# EAGLE board Dashboard Test External rev0 (EAGLE 7.6.0)
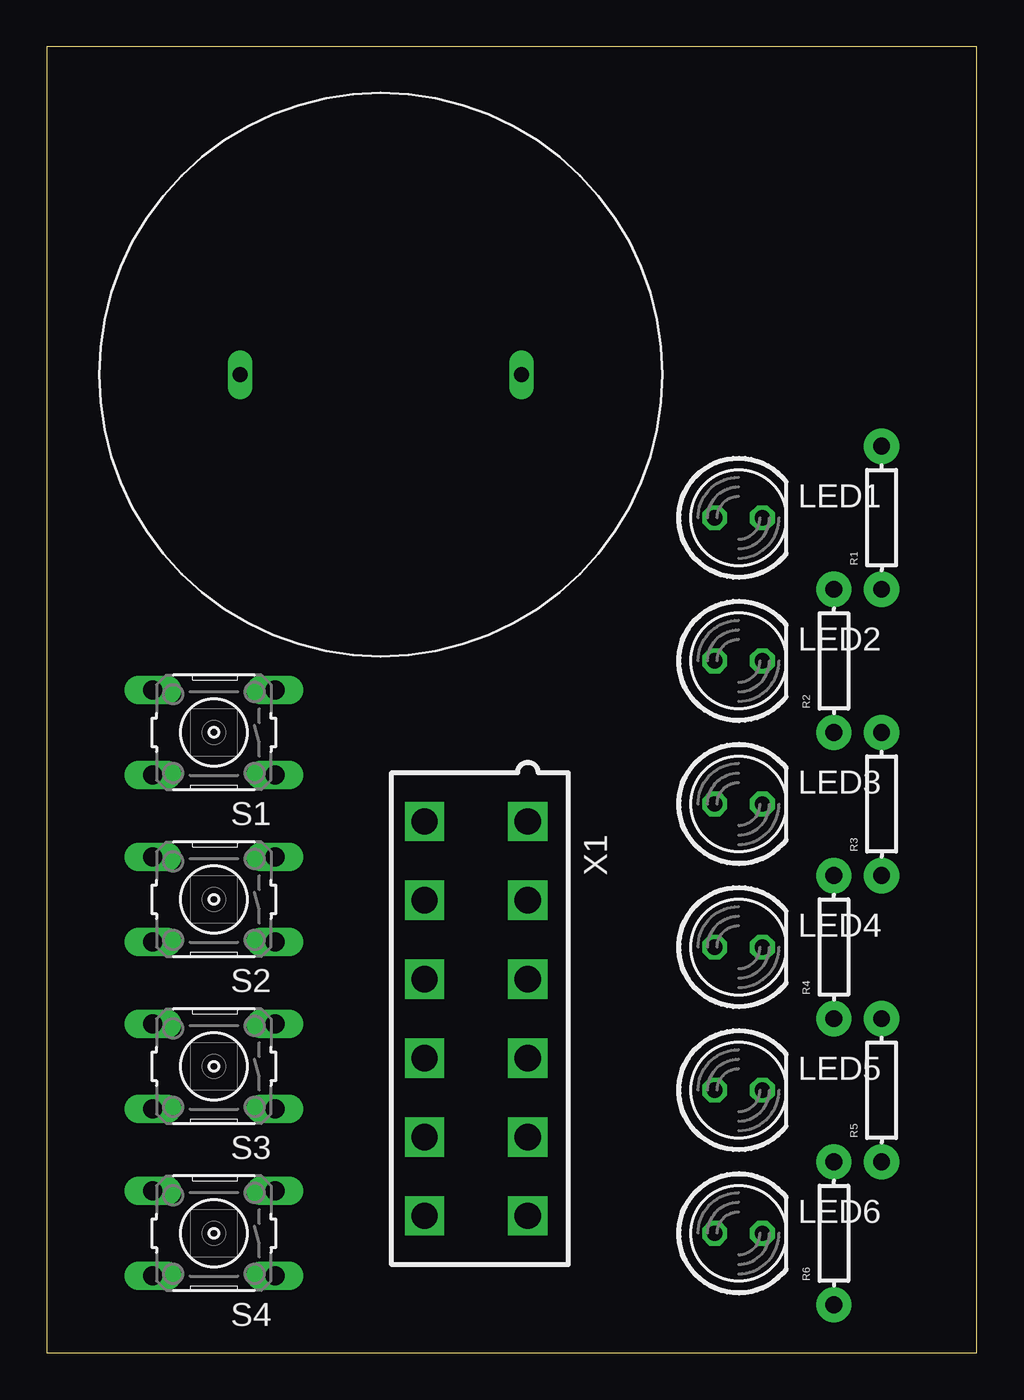
[diagram p0: board, top side]
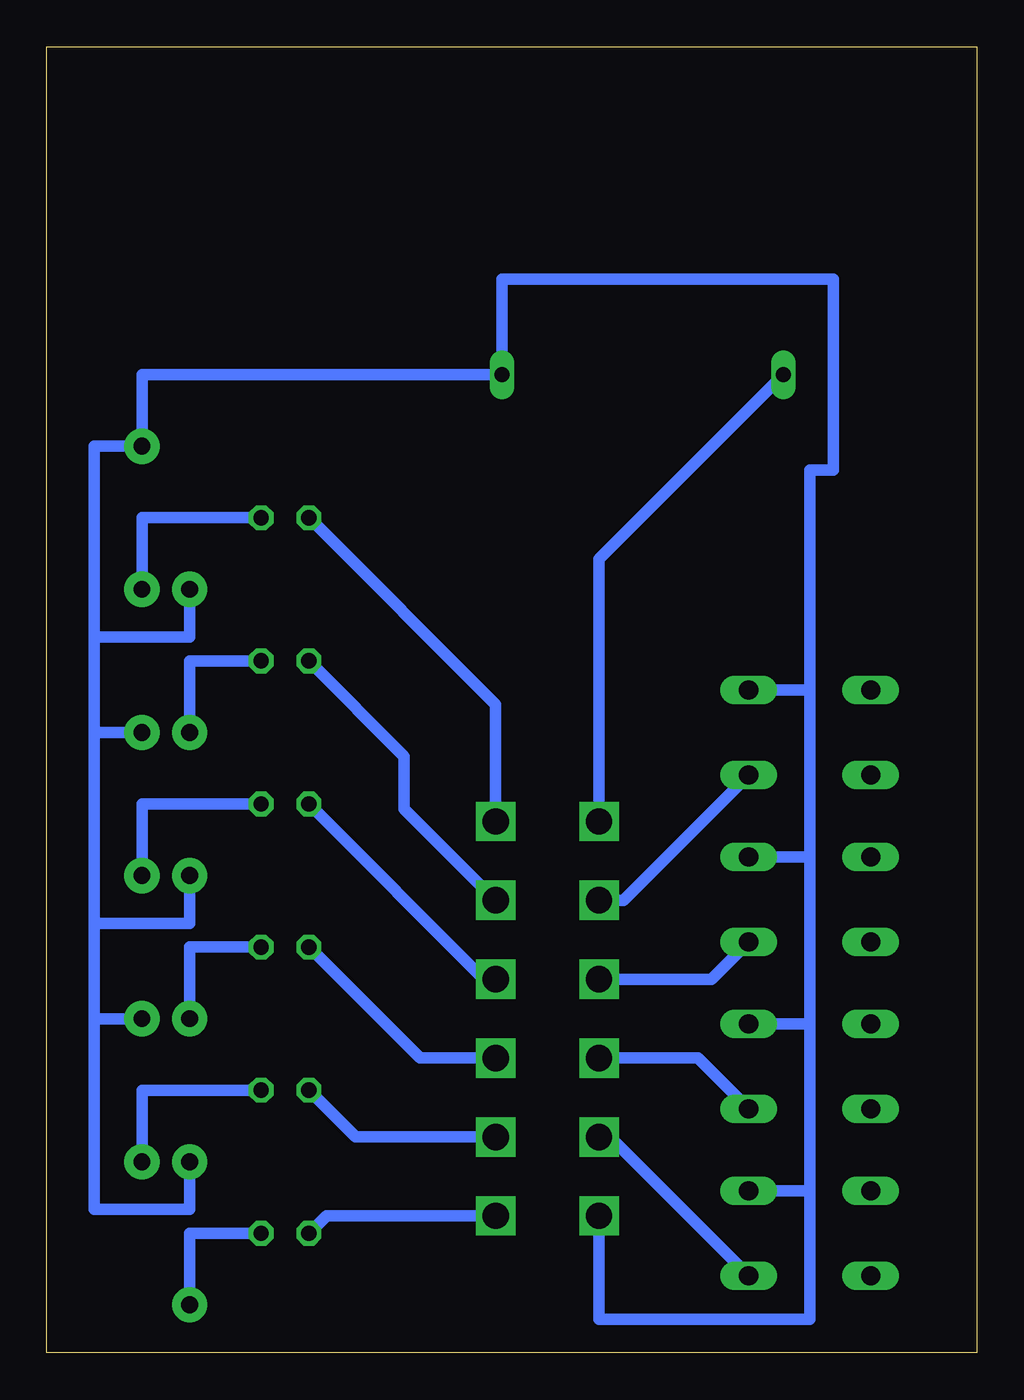
[diagram p1: board, bottom side, seen from below]

Size 49.51 x 69.52 mm. Coordinates in mm from the lower left corner, seen from the top.
Outline: 0,0 49.51,0 49.51,69.52 0,69.52 0,0
Copper layers (1*16): Top 0.035mm / dielectric 1.5mm / Bottom 0.035mm
Design rules "default": minimum track width 10mil, minimum drill 24mil, track to track 8mil, track to pad 8mil, pad to pad 8mil, via to via 8mil, smd to smd 8mil, copper to edge 40mil, drill to drill 8mil, minimum pad ring 10mil, minimum via ring 8mil, stop-mask expansion 4mil, vias tented up to drill 0mil, thermal gap 10mil

## Footprints (pad centres in the part's own frame; a part is rotated, then mirrored left to right if it is on the bottom)
LED-5MM = drill 0.813 octagon: A -1.27,0; K 1.27,0
AXIAL-0.3EZ = drill 0.9 pad 1.88: P$1 -3.81,0; P$2 3.81,0
B3F-10XX = drill 1.016 long: 1 -3.251,2.261; 2 3.251,2.261; 3 -3.251,-2.261; 4 3.251,-2.261
AI-3035-TWT-3V-R = drill 0.8 long: P$1 0,7.5; P$2 0,-7.5
MINIFIT_5566-12 = drill 1.4 square: 1 10.5,-2.75; 2 6.3,-2.75; 3 2.1,-2.75; 4 -2.1,-2.75; 5 -6.3,-2.75; 6 -10.5,-2.75; 7 10.5,2.75; 8 6.3,2.75; 9 2.1,2.75; 10 -2.1,2.75; 11 -6.3,2.75; 12 -10.5,2.75

## Placement (x,y rotation side)
LED1  [LED-5MM]  36.83,44.45 0 top
LED2  [LED-5MM]  36.83,36.83 0 top
LED3  [LED-5MM]  36.83,29.21 0 top
LED4  [LED-5MM]  36.83,21.59 0 top
LED5  [LED-5MM]  36.83,13.97 0 top
LED6  [LED-5MM]  36.83,6.35 0 top
R1  [AXIAL-0.3EZ]  44.45,44.45 90 top
R2  [AXIAL-0.3EZ]  41.91,36.83 90 top
R3  [AXIAL-0.3EZ]  44.45,29.21 90 top
R4  [AXIAL-0.3EZ]  41.91,21.59 90 top
R5  [AXIAL-0.3EZ]  44.45,13.97 90 top
R6  [AXIAL-0.3EZ]  41.91,6.35 90 top
S1  [B3F-10XX]  8.89,33.02 180 top
S2  [B3F-10XX]  8.89,24.13 180 top
S3  [B3F-10XX]  8.89,15.24 180 top
S4  [B3F-10XX]  8.89,6.35 180 top
U$1  AI-3035-TWT-3V-R  [AI-3035-TWT-3V-R]  17.78,52.07 90 top
X1  MINIFIT_5566-12  [MINIFIT_5566-12]  22.86,17.78 90 top

## Library data of the parts
LED1-LED6 R1-R6 U$1 = HyTechDevices
S1-S4 = HyTechDevices; MPN: B3F-1000; OC_FARNELL: 176432; OC_NEWARK: 36M3542
X1 = HyTechDevices; OC_FARNELL: unknown; OC_NEWARK: unknown

## Nets
GND: R1.P$2 R2.P$2 R3.P$2 R4.P$2 R5.P$2 R6.P$2 S1.3 S2.3 S3.3 S4.3 U$1.P$2 X1.12
N$1: S1.1 X1.8
N$2: S2.1 X1.9
N$3: S3.1 X1.10
N$4: S4.1 X1.11
N$5: U$1.P$1 X1.7
N$6: LED6.A X1.6
N$7: LED5.A X1.5
N$8: LED4.A X1.4
N$9: LED3.A X1.3
N$10: LED2.A X1.2
N$11: LED1.A X1.1
N$12: LED1.K R1.P$1
N$13: LED2.K R2.P$1
N$14: LED3.K R3.P$1
N$15: LED4.K R4.P$1
N$16: LED5.K R5.P$1
N$17: LED6.K R6.P$1

## Tracks (layer width: path | path; a pad name or v marks a point on that pad's centre or on a via)
GND
  Bottom 0.61: S1.3 8.89,35.28 | 8.89,35.28 8.89,26.39 | S2.3 8.89,26.39 | X1.12 20.11,1.78 8.89,1.78 8.89,8.61 | 8.89,8.61 8.89,17.5 | 8.89,17.5 8.89,26.39 | S3.3 8.89,17.5 | S4.3 8.89,8.61 | 8.89,35.28 8.89,46.99 7.62,46.99 7.62,57.15 25.28,57.15 U$1.P$2 44.45,52.07 R1.P$2 46.99,48.26 46.99,38.1 | 46.99,38.1 46.99,33.02 | 46.99,33.02 R3.P$2 | R5.P$2 46.99,17.78 | 46.99,17.78 46.99,22.86 | 46.99,22.86 46.99,33.02 | R6.P$2 41.91,7.62 46.99,7.62 46.99,17.78 | R4.P$2 41.91,22.86 46.99,22.86 | R2.P$2 41.91,38.1 46.99,38.1
N$1
  Bottom 0.61: X1.8 18.82,24.08 S1.1
N$2
  Bottom 0.61: X1.9 14.13,19.88 S2.1
N$3
  Bottom 0.61: X1.10 14.84,15.68 S3.1
N$4
  Bottom 0.61: X1.11 19.53,11.48 S4.1
N$5
  Bottom 0.61: X1.7 20.11,42.24 U$1.P$1
N$6
  Bottom 0.61: X1.6 34.63,7.28 LED6.A
N$7
  Bottom 0.61: X1.5 33.07,11.48 LED5.A
N$8
  Bottom 0.61: X1.4 29.65,15.68 LED4.A
N$9
  Bottom 0.61: X1.3 26.23,19.88 LED3.A
N$10
  Bottom 0.61: LED2.A 30.48,31.75 30.48,28.95 X1.2
N$11
  Bottom 0.61: X1.1 25.61,34.5 LED1.A
N$12
  Bottom 0.61: LED1.K 44.45,44.45 R1.P$1
N$13
  Bottom 0.61: LED2.K 41.91,36.83 R2.P$1
N$14
  Bottom 0.61: LED3.K 44.45,29.21 R3.P$1
N$15
  Bottom 0.61: LED4.K 41.91,21.59 R4.P$1
N$16
  Bottom 0.61: LED5.K 44.45,13.97 R5.P$1
N$17
  Bottom 0.61: LED6.K 41.91,6.35 R6.P$1